# Altium PCB WX0.000.863.PcbDoc (part 4 of 4)
Units mil, origin at the board's own origin, x right, y up, seen from the top; angles counter-clockwise.
Board outline 6000 x 4000 mil, 2 copper layers (Top Layer, Bottom Layer); 210 components, 152 nets, 629 pads, 401 vias.
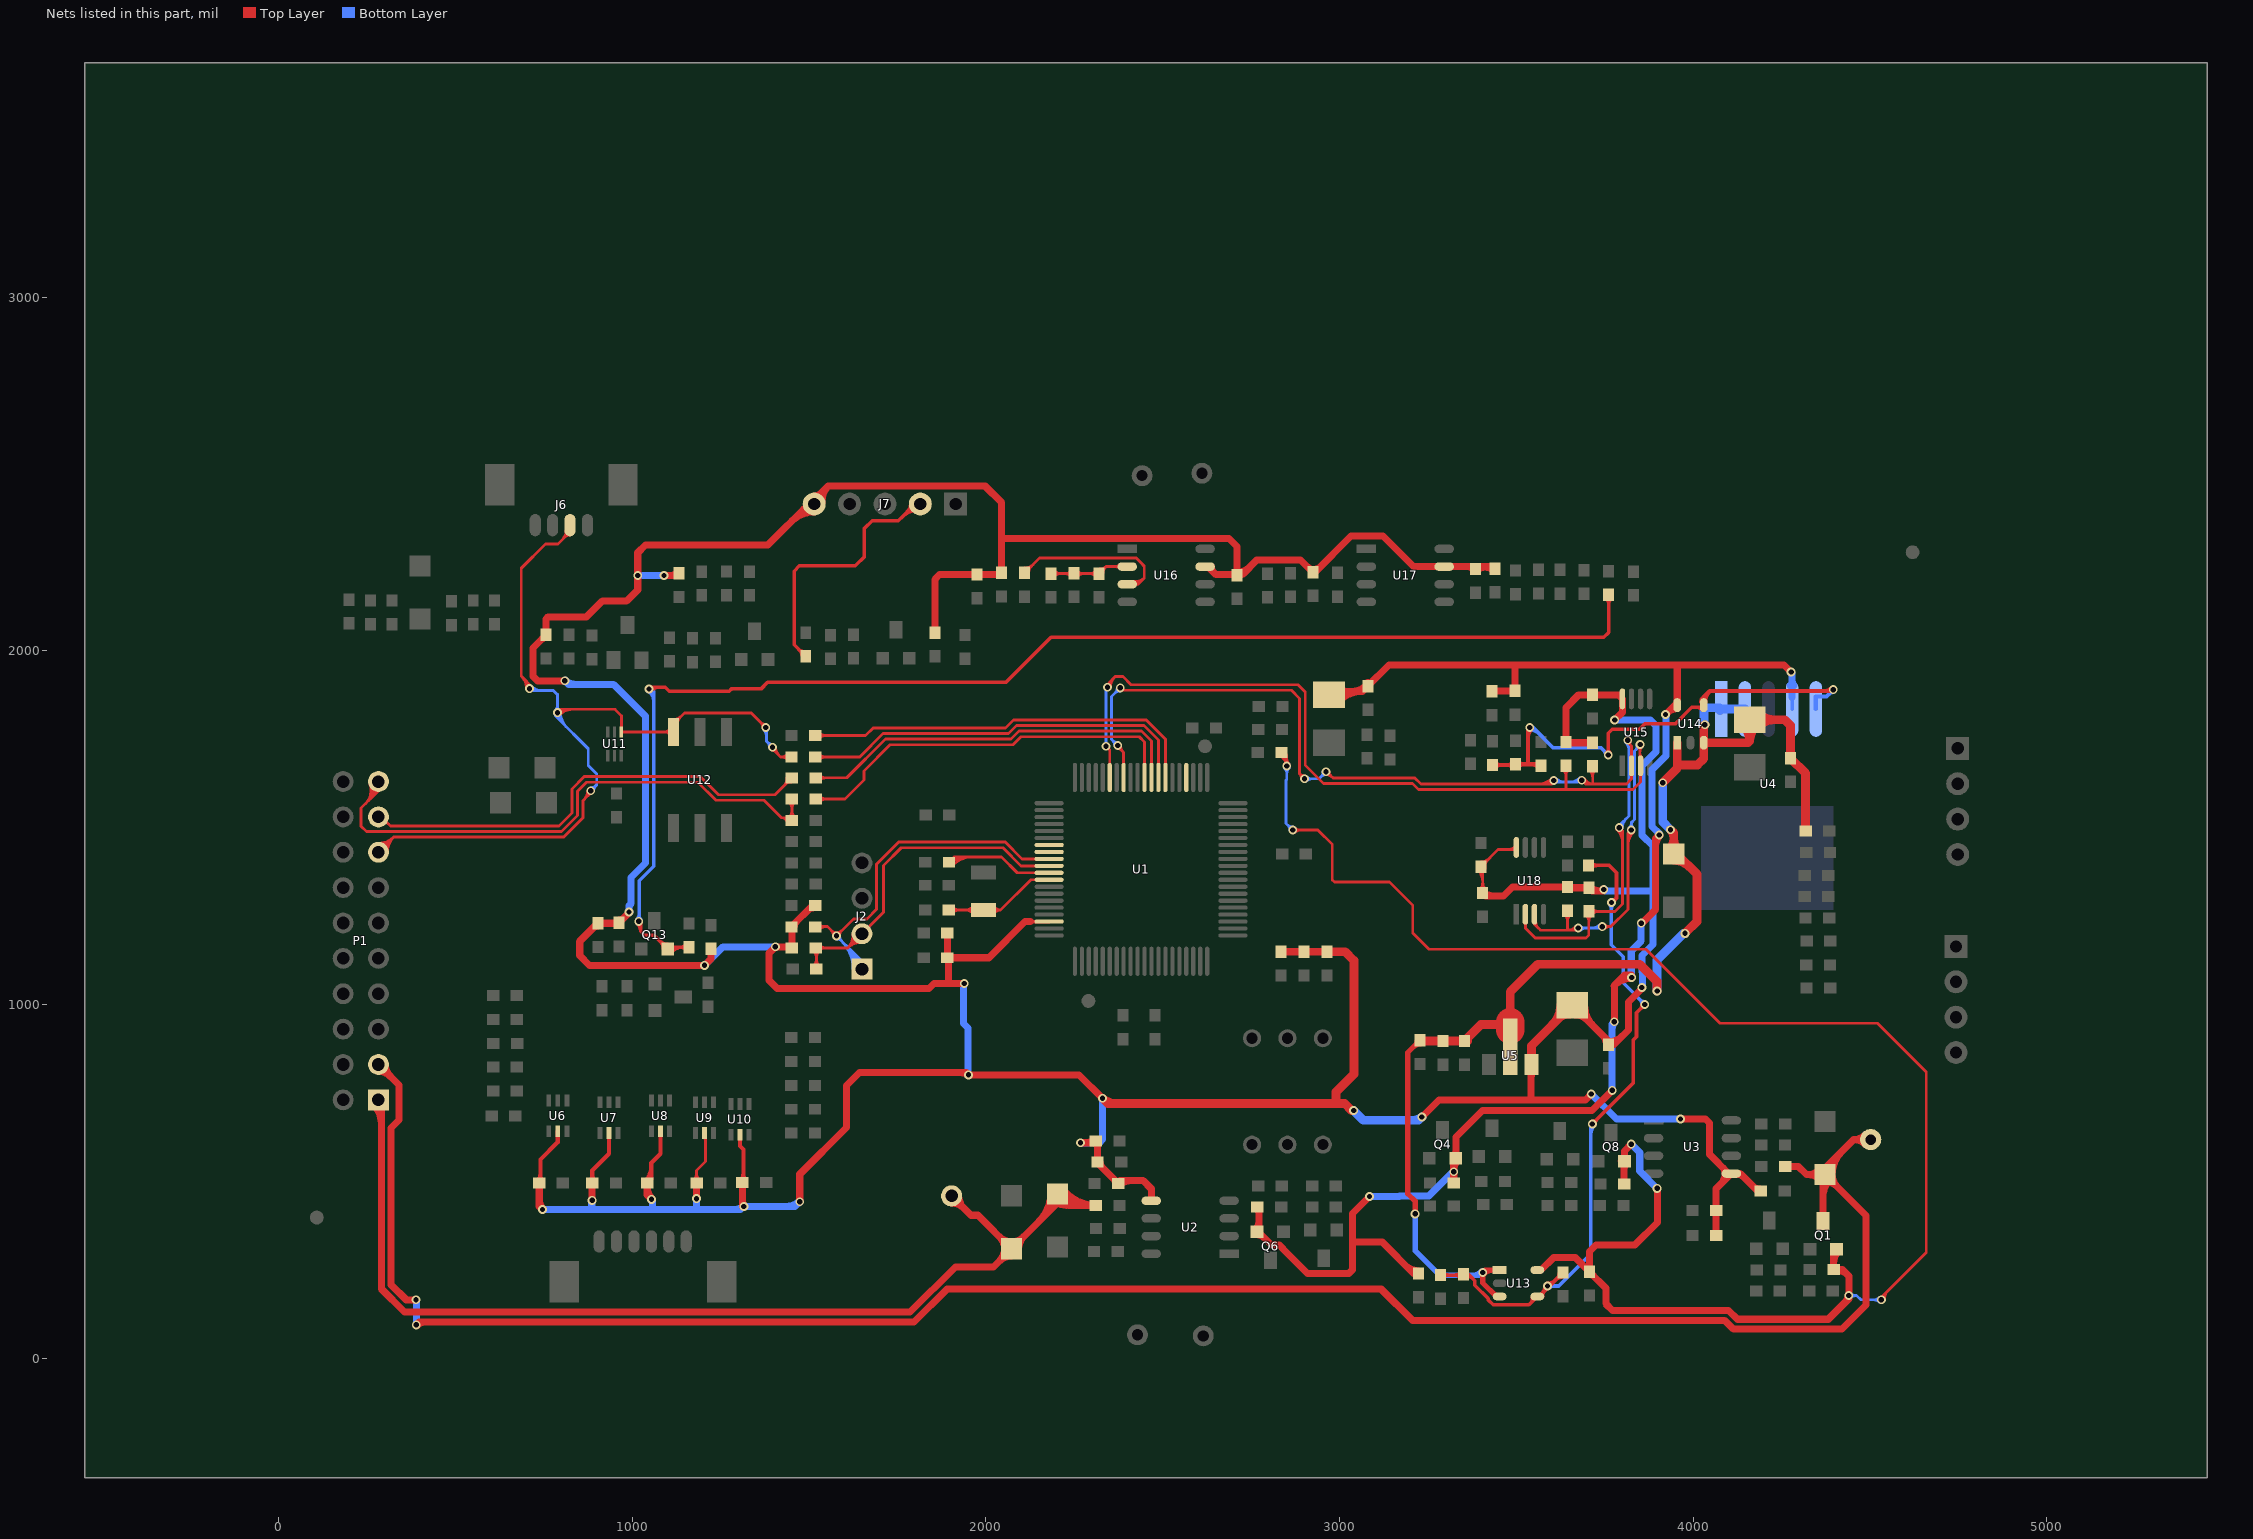
[diagram p4: the nets of this part, all layers, seen from the top]

## Via types
v1: diameter 25, hole 15, Top Layer to Bottom Layer, tented both sides, 401 vias

## Nets (pads, with @x,y where several pads share a name; then routed paths per layer and width w, separated by ;. In a path a pad name is that pad's centre, name@x,y a point inside that pad or via, vN(x,y) a via of type N, cw(c..) or ccw(c..) an arc to the next point about the centre after c; other vN are vias at no path point) (continued)
P_15: J6.2 P1.15 R67.2 U11.1 U12.6 | length 3402.3
  Top Layer w8: P1.15@283,1430.26 325.87,1473.13 ; P1.15@283.2,1447.79 ccw(c283.68,1488.45) 312.43,1459.69 ccw(c341.19,1430.94) P1.15@300.53,1430.46 ; P1.15@283.3,1455.79 ccw(c283.99,1515.01) 325.87,1473.13 ; P1.15@308.53,1430.56 cw(c367.75,1431.25) 325.87,1473.13 ; 686.6,2103 686.6,2147 ; 687,1928 cw(c652.01,1893) v1@701.5,1893 ; 700.66,1914.34 cw(c679.32,1893) v1@709.5,1893 ; v1(710,1893) 710,1905 686.6,1928.4 686.6,2147 ; v1(789,1825) 798.4,1834.4 951.6,1834.4 969.98,1816.02 969.98,1798 U11.1@969.98,1769.97 970.76,1770.75 U12.6@1117.2,1770.75 1117.2,1793.2 1148,1824 1337,1824 v1(1378,1783) ; v1@789.35,1824.65 cw(c812.9,1801.1) 812.9,1834.4 ; v1@795.01,1818.99 cw(c832.21,1781.79) 832.21,1834.4 ; 802.01,2313.01 ccw(c775.76,2339.25) J6.2@812.88,2339.25 ; 810.76,2321.76 cw(c824.63,2307.9) J6.2@824.63,2327.5 ; J6.2@824.63,2355 824.63,2335.63 791,2302 755.34,2302 686.6,2233.26 686.6,2147 ; 864.6,1579.6 ccw(c840.7,1603.51) v1@874.5,1603.9 ; v1(883,1604) 886,1601 861.6,1576.6 861.6,1527.91 806.82,1473.13 325.87,1473.13 ; U12.6@1108.89,1762.44 ccw(c1088.83,1742.39) 1088.83,1770.75 ccw(c1088.83,1799.11) U12.6@1108.89,1779.06 ; U12.6@1117.2,1806.12 ccw(c1117.2,1837.31) 1139.25,1815.25 ; U12.6@1128.94,1794.37 cw(c1154.47,1794.37) 1136.42,1812.42 ; v1@1369.5,1783 ccw(c1348.98,1783) 1363.49,1797.51 ccw(c1378,1812.02) v1@1378,1791.5 ; v1@1397,1718.5 cw(c1397,1707.64) 1404.68,1715.32 ; v1(1397,1727) 1397,1723 1420.09,1699.91 R67.2@1450.78,1699.91 ; v1@1405.5,1727 ccw(c1435.68,1727) 1414.34,1705.66 ; R67.2@1440.65,1691.78 ccw(c1421.02,1672.15) 1421.02,1699.91 ccw(c1421.02,1727.67) R67.2@1440.65,1708.04
  Bottom Layer w8: v1(710,1893) 716,1893 721,1888 777,1888 788,1877 789,1877 v1(789,1825) 789,1823 789,1810 ; v1@710.35,1893.35 ccw(c723.28,1906.28) 723.28,1888 ; v1@716.01,1899.01 ccw(c742.59,1925.59) 742.59,1888 ; v1@781.5,1825 ccw(c799.61,1825) 786.8,1812.2 ; v1@782.99,1831.01 ccw(c768.48,1845.52) 789,1845.52 ccw(c809.52,1845.52) v1@795.01,1831.01 ; v1@789.5,1825 ccw(c826.92,1825) 800.46,1798.54 ; v1@797.5,1825 ccw(c854.23,1825) 814.12,1784.88 ; v1(883,1604) 900.2,1621.2 900.2,1651.8 876,1676 876,1723 789,1810 ; v1@883,1612.5 ccw(c883,1633.02) 897.51,1618.51 ccw(c912.02,1604) v1@891.5,1604 ; v1@1371.99,1776.99 cw(c1352.65,1757.65) 1380,1757.65 ; v1(1378,1783) 1380,1785 1380,1744 v1(1397,1727) ; 1380,1767.31 cw(c1393.69,1767.31) v1@1384.01,1776.99 ; v1@1388.5,1727 ccw(c1367.98,1727) 1382.49,1741.51 ccw(c1397,1756.02) v1@1397,1735.5 ; 789,1810 cw(c797.98,1810) 793.37,1817.71 ccw(c797.98,1810) 789,1810 ; 789,1810 ccw(c780.02,1810) 784.63,1817.71 cw(c780.02,1810) 789,1810
P_17: P1.17 R62.1 | length 1387
  Top Layer w8: P1.17@283,1530.26 291.47,1530.26 317,1504.73 793.73,1504.73 830,1541 830,1609.34 864.76,1644.1 1192.9,1644.1 1244,1593 1404.37,1593 1451.78,1640.41 R62.1@1451.78,1640.82 ; P1.17@289.42,1513.95 cw(c297.33,1493.85) 312.61,1509.13 ; 1428.45,1617.08 ccw(c1404.71,1640.82) R62.1@1438.28,1640.82 ; 1434.25,1622.89 cw(c1449.78,1607.36) R62.1@1449.78,1629.32
P_19: P1.19 R31.1 R63.1 | length 1883.1
  Top Layer w8: 247.13,1568.13 ccw(c211.09,1604.17) P1.19@259,1621.55 ; 256.02,1577.02 ccw(c224.14,1608.9) P1.19@266.52,1624.28 ; 264.91,1585.91 ccw(c237.18,1613.64) P1.19@274.04,1627.01 ; 273.8,1594.8 ccw(c250.23,1618.37) P1.19@281.56,1629.74 ; P1.19@283,1630.26 283,1604 234,1555 234,1504 249.07,1488.93 800.28,1488.93 845.8,1534.46 845.8,1602.8 871.3,1628.3 928.07,1628.3 928.37,1628 1186.66,1628 1237.46,1577.2 1372.8,1577.2 1422,1528 ; 1433.78,1528 cw(c1433.78,1514.29) R31.1@1446.53,1519.35 ; R31.1@1439.09,1516.4 ccw(c1422,1509.62) 1422,1528 ; R31.1@1443.65,1528.77 ccw(c1424.02,1548.4) 1451.78,1548.4 ccw(c1479.54,1548.4) R31.1@1459.91,1528.77 ; R63.1@1443.65,1572.6 cw(c1424.02,1552.96) 1451.78,1552.96 cw(c1479.54,1552.96) R63.1@1459.91,1572.6 ; R31.1@1451.78,1520.64 R63.1@1451.78,1577.2 ; R31.1@1451.78,1528 1445,1528 1439,1528 1422,1528
PROGOP: R60.1 R85.1 R93.2 U4.5 U14.4 | length 1733.6
  Top Layer w10: 3533,1679 v1@3533,1778 ; 3533,1752.82 cw(c3568.18,1752.82) v1@3543.3,1777.7 ; v1@3754.7,1710.3 ccw(c3741.89,1723.11) 3760,1723.11 ccw(c3778.11,1723.11) v1@3765.3,1710.3 ; v1(3760,1705) 3760,1767 3771,1778 3847.69,1778 3863.69,1794 3950,1794 3996,1840 4029.8,1840 U14.4@4029.8,1846.3 ; 4009.56,1840 cw(c4009.56,1817.2) U14.4@4025.68,1833.32
  Top Layer w12: R93.2@3433,1677 3496,1677 R60.1@3498,1679 ; R93.2@3439.72,1670.28 cw(c3455.94,1654.07) 3455.94,1677 cw(c3455.94,1699.93) R93.2@3439.72,1683.72 ; R60.1@3491.28,1670.28 ccw(c3475.07,1654.07) 3475.07,1677 ccw(c3475.07,1699.93) R60.1@3491.28,1683.72 ; R60.1@3498.7,1679.7 R60.1@3498,1679 ; R60.1@3504.72,1672.28 cw(c3520.94,1656.07) 3520.94,1679 cw(c3520.94,1701.93) R60.1@3504.72,1685.72 ; 3542.24,1679 cw(c3542.24,1649.24) R85.1@3563.28,1670.28 ; 3551.89,1679 ccw(c3551.89,1695.11) R85.1@3563.28,1683.72 ; R85.1@3570,1675 3566,1679 3533,1679 R60.1@3498,1679 ; U14.4@4022.63,1855.01 cw(c4037.86,1855.32) 4027.09,1866.09 ; U14.4@4026.39,1858.57 ccw(c4018.15,1866.81) 4029.8,1866.81 ccw(c4041.46,1866.81) U14.4@4033.22,1858.57 ; U14.4@4029.8,1846.3 4029.8,1868.8 4047,1886 ; U14.4@4034.63,1855.26 cw(c4076.88,1856.11) 4047,1886 ; 4370.65,1886 ccw(c4370.65,1915.35) v1@4391.4,1894.6 ; v1(4396,1890) 4392,1886 4047,1886
  Bottom Layer w10: v1@3538,1775.5 cw(c3538,1735.67) 3566.17,1763.83 ; v1@3547,1783 3604.8,1725.2 3739.8,1725.2 v1(3760,1705) ; v1@3752.5,1705 ccw(c3734.39,1705) 3747.2,1717.8 ccw(c3760,1730.61) v1@3760,1712.5
  Bottom Layer w12: U4.5@4346.86,1835.18 4346.86,1871 4377,1871 v1(4396,1890) ; v1@4389.5,1890 cw(c4373.81,1890) 4384.9,1878.9 cw(c4396,1867.81) v1@4396,1883.5
  other v1: 3538,1783
PROGOP_BF: R11.1 R12.2 R57.1 R69.1 U13.4 | length 2379.1
  Top Layer w10: R69.1@3285,235 3367,235 ; R69.1@3292.42,227.58 cw(c3310.35,209.65) 3310.35,235 cw(c3310.35,260.35) R69.1@3292.42,242.42 ; R12.2@3342.58,227.58 ccw(c3324.65,209.65) 3324.65,235 ccw(c3324.65,260.35) R12.2@3342.58,242.42 ; R12.2@3350.06,234.5 cw(c3353.89,202.43) 3376.73,225.27 ; R12.2@3350.33,234.62 cw(c3358.83,224.93) 3367.95,234.05 ; R12.2@3356.92,227.11 cw(c3365.89,216.89) 3375.5,226.5 ; R12.2@3359.39,230.3 cw(c3367,226.49) 3367,235 ; R12.2@3359.39,239.7 ccw(c3367,243.51) 3367,235 ; 3540.1,155 ccw(c3527.19,167.91) U13.4@3544.82,172.68 ; U13.4@3559.3,174.2 3535.67,150.57 3434.36,150.57 3420.52,164.41 3420.52,168.48 3382.79,206.21 3382.79,219.21 3367,235 ; U13.4@3564.2,174.2 R11.1@3632,242 ; U13.4@3570.95,180.95 ccw(c3547.91,204) v1@3580.5,204 ; U13.4@3573.98,174.2 cw(c3597.61,174.2) 3580.9,190.9 ; v1@3588,211.5 ccw(c3588,244.09) 3611.05,221.05 ; 3610.66,220.66 cw(c3632,199.32) R11.1@3632,229.5 ; 3615.49,225.49 ccw(c3600.98,240) R11.1@3621.5,240 ; R57.1@3704,1393 3763,1393 3783.2,1372.8 3783.2,1300.2 ; R57.1@3711.42,1385.58 cw(c3729.35,1367.65) 3729.35,1393 cw(c3729.35,1418.35) R57.1@3711.42,1400.42 ; v1(3715,662) 3830,777 3830,898.96 3839.8,908.76 3839.8,976.8 v1(3863,1000) ; v1@3715,669.5 ccw(c3715,687.61) 3727.8,674.8 ccw(c3740.61,662) v1@3722.5,662 ; v1@3769.79,1295.46 ccw(c3771.53,1311.87) 3783.2,1300.2 ; v1@3770,1287 3783.2,1300.2 ; v1@3776.5,1288 cw(c3789.78,1288) 3780.39,1297.39 ; v1@3855.5,1000 cw(c3837.39,1000) 3850.2,987.2 cw(c3863,974.39) v1@3863,992.5
  Bottom Layer w10: v1(3588,204) 3620,204 3711,295 v1@3711,658 ; v1@3593.3,198.7 cw(c3606.11,185.89) 3606.11,204 cw(c3606.11,222.11) v1@3593.3,209.3 ; 3711,634.24 cw(c3742.76,634.24) v1@3720.3,656.7 ; v1@3763.7,1282.7 cw(c3753.31,1272.31) 3768,1272.31 ; 3768,1208.92 3768,1169.18 3802.18,1135 3802.18,1087.98 ; 3768,1230.78 v1@3768,1286 ; 3768,1267.48 cw(c3789.52,1267.48) v1@3774.3,1282.7 ; 3768.3,1209.22 3768.3,1230.48 ; 3800.7,1086.5 3800.7,1062.3 v1(3863,1000) ; v1@3855.5,1000 ccw(c3837.39,1000) 3850.2,1012.8 ccw(c3863,1025.61) v1@3863,1007.5
  other v1: 3769,1288
RED_RXD: J7.2 R106.1 | length 884.6
  Top Layer w10: 1469.66,2005.34 ccw(c1491,2026.68) R106.1@1491,1996.5 ; 1474.49,2000.51 cw(c1459.98,1986) R106.1@1480.5,1986 ; R106.1@1491,1984 1458,2017 1458,2120 1458,2225.2 1473,2240.2 1631.2,2240.2 1657,2266 1657,2346 1679,2368 1753,2368 J7.2@1800,2415 ; 1761.77,2376.77 cw(c1811.94,2326.6) J7.2@1814.39,2397.51 ; 1778.04,2393.04 cw(c1813.03,2358.05) J7.2@1814.74,2407.5 ; 1778.66,2393.66 ccw(c1757.32,2415) J7.2@1787.5,2415
RESET: C4.2 J2.2 R42.2 U1.10 | length 1210.6
  Top Layer w8: R42.2@1512.65,1151.96 cw(c1492.13,1131.45) 1521.14,1131.45 ; C4.2@1512.79,1108.13 ccw(c1492.63,1128.3) 1521.14,1128.3 ; C4.2@1521.14,1100 1521.14,1157.64 1518.78,1160 1610,1160 ; 1521.14,1127.23 ccw(c1548.15,1127.23) C4.2@1529.05,1108.13 ; 1521.14,1133.21 cw(c1547.66,1133.21) 1528.91,1151.96 cw(c1548.32,1132.55) 1548.32,1160 ; R42.2@1528.91,1168.22 ccw(c1548.76,1188.07) 1548.76,1160 ; J2.2@1624.52,1198.41 cw(c1574.71,1195.29) 1610,1160 ; J2.2@1632.51,1198.91 cw(c1598.31,1196.77) 1622.54,1172.54 cw(c1646.77,1148.31) J2.2@1648.91,1182.51 ; J2.2@1648.41,1174.52 ccw(c1645.29,1124.71) 1610,1160 ; U1.10@2179.14,1391.84 2099.8,1391.84 2048.64,1443 1761,1443 1710.8,1392.8 1710.8,1260.8 J2.2@1650,1200 1610,1160
S3: R65.1 U1.67 | length 1183
  Top Layer w8: R65.1@1517.78,1760 1587,1760 1660,1760 1681.8,1781.8 2056,1781.8 2078.6,1804.4 2178,1804.4 2453.8,1804.4 2504,1754.2 2504,1753.89 2507.88,1750 U1.67@2507.88,1641.84 ; R65.1@1527.91,1751.87 cw(c1547.54,1732.24) 1547.54,1760 cw(c1547.54,1787.76) R65.1@1527.91,1768.13
S4: R67.1 U1.68 | length 1173.5
  Top Layer w8: R67.1@1517.78,1699.91 1643.56,1699.91 1709.66,1766 2064.31,1766 2086.91,1788.6 2251,1788.6 2447.26,1788.6 2488.2,1747.66 U1.68@2488.2,1641.84 ; R67.1@1527.91,1691.78 cw(c1547.54,1672.15) 1547.54,1699.91 cw(c1547.54,1727.67) R67.1@1527.91,1708.04
S5: R62.2 U1.69 | length 1162.7
  Top Layer w8: R62.2@1518.78,1640.82 1606.82,1640.82 1716.2,1750.2 2070.86,1750.2 2093.46,1772.8 2440.71,1772.8 2468.51,1745 U1.69@2468.51,1641.84 ; R62.2@1528.91,1632.69 cw(c1548.54,1613.05) 1548.54,1640.82 cw(c1548.54,1668.58) R62.2@1528.91,1648.95
S6: R63.2 U1.70 | length 1211.6
  Top Layer w8: R63.2@1518.78,1580.73 1601.73,1580.73 1655.4,1634.4 1655.4,1660.18 1729.62,1734.4 2077.4,1734.4 2100,1757 2434,1757 2448.83,1742.17 U1.70@2448.83,1641.84 2448.83,1685.17 ; R63.2@1528.91,1572.6 cw(c1548.54,1552.96) 1548.54,1580.73 cw(c1548.54,1608.49) R63.2@1528.91,1588.86
S9: U1.7
S10: U1.8
SING_OUT: Q13.E R75.1 R113.1 | length 4116.1
  Top Layer w10: v1@1014.08,1229.34 cw(c995.09,1207.54) 1024,1207.54 ; v1(1019,1235) 1024,1235 1024,1208 1036,1196 1061.98,1196 Q13.E@1100.98,1157 1105.98,1162 R75.1@1160.98,1162 ; v1(1048,1892) 1048,1897 1094,1897 1105,1886 1275,1886 1281,1892 1364.44,1892 1383.04,1910.6 2057.36,1910.6 2184.56,2037.8 3747,2037.8 3761,2051.8 R113.1@3761,2158 ; v1@1053.3,1886.7 cw(c1078.18,1861.82) 1078.18,1897 ; Q13.E@1087.98,1157 ccw(c1056.6,1157) 1078.79,1179.19 ccw(c1100.98,1201.38) Q13.E@1100.98,1170 ; Q13.E@1103.11,1154.88 cw(c1120.3,1137.69) 1120.3,1162 cw(c1120.3,1176.31) Q13.E@1110.18,1166.19 ; Q13.E@1110.18,1147.81 cw(c1144.44,1113.54) 1144.44,1162 ; R75.1@1153.56,1154.58 ccw(c1135.64,1136.65) 1135.64,1162 ccw(c1135.64,1187.35) R75.1@1153.56,1169.42 ; R113.1@3753.58,2148.58 cw(c3735.65,2130.65) 3761,2130.65 cw(c3786.35,2130.65) R113.1@3768.42,2148.58
  Bottom Layer w10: v1@1013.7,1240.3 ccw(c998.48,1255.52) 1020,1255.52 ; v1@1017.45,1236.55 v1(1019,1235) 1020,1236 1020,1301.26 1019.82,1301.44 1019.82,1349.82 1060.9,1390.9 1060.9,1863.1 1060.9,1885.1 1059,1887 1048,1898 v1(1048,1892) ; 1020,1250.69 ccw(c1034.69,1250.69) v1@1024.3,1240.3 ; v1@1044.9,1885.17 cw(c1033.65,1860.35) 1060.9,1860.35 ; v1@1049.03,1894.28 cw(c1040.69,1875.87) 1060.9,1875.87
SZ_P_SCL: R6.2 R56.2 U1.73 U15.2 U18.2 | length 3751.7
  Top Layer w8: v1@2373,1723.5 cw(c2373,1710.22) 2382.39,1719.61 ; v1@2373,1729 2389.77,1712.23 U1.73@2389.77,1641.84 ; v1(2380,1895) 2386.8,1888.2 2864,1888.2 2887,1865.2 2887,1652 ; v1@2381.49,1731.52 ccw(c2404.74,1730.2) 2388.27,1713.73 ; v1@2892.5,1638.22 ccw(c2873.7,1638.7) 2887,1652 ; v1@2900.78,1646.5 cw(c2900.3,1665.3) 2887,1652 ; v1(2901,1638) 2887,1652 ; v1@2962,1649.5 cw(c2962,1624.15) 2979.92,1642.08 ; v1(2962,1658) 2964,1658 2981.3,1640.7 3212.99,1640.7 3230.09,1623.6 3600.6,1623.6 3606,1629 v1(3606,1633) ; v1@2970.5,1658 ccw(c2986.19,1658) 2975.1,1646.9 ; U18.2@3522.99,1230.55 cw(c3516.71,1224.27) 3525.59,1224.27 cw(c3534.47,1224.27) U18.2@3528.19,1230.55 ; U18.2@3525.59,1255 3525.59,1215.41 3553.5,1187.5 3696.5,1187.5 3705,1196 R56.2@3705,1263 3779,1263 3800,1284 v1@3800,1492 ; 3562.79,1623.6 ccw(c3562.79,1676.21) v1@3599.99,1639.01 ; 3582.1,1623.6 ccw(c3582.1,1656.9) v1@3605.65,1633.35 ; v1(3685,1634) 3695.4,1623.6 3716,1623.6 ; v1@3685.44,1634.23 ccw(c3702.88,1643.21) 3702.88,1623.6 ; v1@3692.56,1637.89 ccw(c3716,1649.97) 3716,1623.6 ; R56.2@3696.87,1252.87 cw(c3677.24,1233.24) 3705,1233.24 cw(c3732.76,1233.24) R56.2@3713.13,1252.87 ; R6.2@3706.87,1662.87 cw(c3684.82,1640.82) 3716,1640.82 ; R56.2@3713.13,1254.87 cw(c3732.76,1235.24) 3732.76,1263 cw(c3732.76,1290.76) R56.2@3713.13,1271.13 ; R6.2@3715,1673 3716,1672 3716,1623.6 ; 3716,1645.65 cw(c3740.35,1645.65) R6.2@3723.13,1662.87 ; v1@3784.99,1493.99 cw(c3748.75,1457.75) 3800,1457.75 ; v1@3790.65,1499.65 cw(c3768.07,1477.07) 3800,1477.07 ; v1(3815,1747) 3815,1741 3825.59,1730.41 U15.2@3825.59,1675 ; v1@3821.9,1742.03 ccw(c3827.31,1738.13) 3822.59,1733.41 ; U15.2@3822.99,1650.55 cw(c3816.71,1644.27) 3825.59,1644.27 cw(c3834.47,1644.27) U15.2@3828.19,1650.55 ; U15.2@3822.99,1699.45 ccw(c3816.71,1705.73) 3825.59,1705.73 ccw(c3834.47,1705.73) U15.2@3828.19,1699.45 ; U15.2@3827.54,1676.95 U15.2@3825.59,1675 ; 3716,1623.6 3811,1623.6 3825.59,1638.19 U15.2@3825.59,1675
  Bottom Layer w8: v1@2364.5,1732 ccw(c2343.98,1732) 2358.49,1746.51 ccw(c2373,1761.02) v1@2373,1740.5 ; v1@2371,1732 v1(2373,1732) 2355.8,1749.2 2355.8,1870.8 v1(2380,1895) ; v1@2371.5,1895 cw(c2350.98,1895) 2365.49,1880.49 cw(c2380,1865.98) v1@2380,1886.5 ; v1(2901,1638) 2942,1638 v1(2962,1658) ; v1@2907.01,1631.99 cw(c2921.52,1617.48) 2921.52,1638 cw(c2921.52,1658.52) v1@2907.01,1644.01 ; v1@2953.5,1658 cw(c2932.98,1658) 2947.49,1643.49 cw(c2962,1628.98) v1@2962,1649.5 ; v1(3606,1633) 3606,1632 3609,1629 3674,1629 3679,1634 v1(3685,1634) ; v1@3612.01,1639.01 ccw(c3636.18,1663.18) 3636.18,1629 ; 3652.41,1629 ccw(c3652.41,1666.59) v1@3678.99,1640.01 ; 3671.72,1629 ccw(c3671.72,1647.28) v1@3684.65,1634.35 ; v1(3791,1500) 3791,1505.7 3818.3,1533 3818.3,1743.7 v1(3815,1747) ; v1@3799.5,1500 cw(c3833.78,1500) 3809.54,1524.24 ; v1@3808.99,1740.99 cw(c3786.51,1718.51) 3818.3,1718.51 ; 3818.3,1734.45 cw(c3827.55,1734.45) v1@3821.01,1740.99
SZ_P_SDA: R61.1 R99.1 U1.75 U15.3 U18.3 | length 3575.5
  Top Layer w8: v1(2340,1730) 2350.4,1719.6 U1.75@2350.4,1641.84 ; v1(2344,1897) 2344,1905 2366,1927 2388,1927 2411,1904 2883,1904 2903,1884 2903,1677 2955.1,1624.9 3206.44,1624.9 3223.54,1607.8 3640,1607.8 ; v1@2344.5,1897 cw(c2365.02,1897) 2350.51,1911.51 ; v1@2352.5,1897 cw(c2392.33,1897) 2364.17,1925.17 ; U18.3@3551.18,1255 3551.18,1226.82 3568,1210 3647,1210 ; U18.3@3554.86,1233.15 ccw(c3579.02,1233.15) 3561.93,1216.07 ; R99.1@3631.87,1664.87 cw(c3612.24,1645.24) 3640,1645.24 cw(c3667.76,1645.24) R99.1@3648.13,1664.87 ; R61.1@3636.87,1254.87 cw(c3617.24,1235.24) 3645,1235.24 cw(c3672.76,1235.24) R61.1@3653.13,1254.87 ; 3640,1617.8 3640,1641 ; R99.1@3640,1675 3640,1641 ; R61.1@3645,1265 3645,1212 3647,1210 ; 3662.45,1210 ccw(c3662.45,1224.87) v1@3674.59,1216.29 ; v1@3668.06,1220.9 cw(c3647,1235.78) 3647,1210 ; v1(3675,1216) 3675,1215 3670,1210 3647,1210 ; v1(3743,1220) 3767,1220 3815.8,1268.8 3815.8,1483.8 v1(3825,1493) ; v1@3749.01,1213.99 cw(c3763.52,1199.48) 3763.52,1220 cw(c3763.52,1240.52) v1@3749.01,1226.01 ; 3815.8,1450.27 cw(c3867.73,1450.27) v1@3831.01,1486.99 ; 3815.8,1469.58 cw(c3848.42,1469.58) v1@3825.35,1492.65 ; v1@3843.99,1728.99 cw(c3831.89,1716.89) 3849,1716.89 ; U15.3@3848.58,1650.55 cw(c3842.3,1644.27) 3851.18,1644.27 cw(c3860.06,1644.27) U15.3@3853.78,1650.55 ; 3849,1710.99 ccw(c3865.32,1710.99) U15.3@3853.78,1699.45 ; 3849,1712.07 cw(c3872.94,1712.07) v1@3856.01,1728.99 ; v1(3850,1735) 3850,1736 3849,1737 3849,1677.18 U15.3@3851.18,1675 3851.18,1629 3829.98,1607.8 3640,1607.8 ; 3640,1607.8 3640,1641
  Bottom Layer w8: v1(2340,1730) v1@2340,1893 ; v1(3675,1216) 3739,1216 v1(3743,1220) ; v1@3681.01,1209.99 cw(c3695.52,1195.48) 3695.52,1216 cw(c3695.52,1236.52) v1@3681.01,1222.01 ; 3712.82,1216 ccw(c3712.82,1250.18) v1@3736.99,1226.01 ; v1@3818.99,1499.01 ccw(c3804.48,1513.52) 3825,1513.52 ccw(c3845.52,1513.52) v1@3831.01,1499.01 ; v1(3825,1493) 3825,1513.9 3834.1,1523 3834.1,1716.1 3851,1733 3851,1734 v1(3850,1735) ; 3835.6,1717.6 ccw(c3821.03,1732.17) v1@3841.54,1734.17 ; 3840.61,1722.61 cw(c3850,1713.22) v1@3850,1726.5
TOOL0: J2.1 R40.1 U1.9 | length 1493
  Top Layer w8: R40.1@1517.78,1220 1552,1220 v1(1578,1194) 1626,1242 1664,1242 1691.33,1269.33 1691.33,1396.33 1754,1459 ; R40.1@1527.91,1211.05 cw(c1549.52,1189.44) 1549.52,1220 ; R40.1@1527.91,1227.31 ccw(c1545.57,1244.97) 1545.57,1220 ; v1@1569.5,1194 ccw(c1548.98,1194) 1563.49,1208.51 ccw(c1578,1223.02) 1578,1202.5 ccw(c1578,1223.02) 1592.51,1208.51 ccw(c1607.02,1194) v1@1586.5,1194 ; 1695,1400 1754,1459 ; U1.9@2179.14,1411.53 2102.46,1411.53 2054.98,1459 1754,1459
  Bottom Layer w8: v1@1578,1185.5 cw(c1578,1164.98) 1592.51,1179.49 cw(c1607.02,1194) v1@1586.5,1194 ; v1(1578,1194) 1650,1122 J2.1@1650,1100 ; 1590.87,1181.13 cw(c1509.73,1100) J2.1@1624.47,1100 ; 1604.52,1167.48 cw(c1537.04,1100) J2.1@1632.47,1100 ; 1618.18,1153.82 cw(c1564.36,1100) J2.1@1640.47,1100 ; 1631.84,1140.16 cw(c1591.67,1100) J2.1@1648.47,1100
V+: R110.2 U16.3 | length 572.6
  Top Layer w8: R110.2@2110,2220 2151.8,2261.8 2425.42,2261.8 2439.36,2247.86 2439.36,2247.64 2448,2239 2448,2206 ; R110.2@2110,2233.5 ccw(c2110,2266.09) 2133.05,2243.05 ; R110.2@2121.5,2222 cw(c2144.43,2222) 2128.22,2238.22 ; U16.3@2400,2188 2430,2188 ; U16.3@2415.56,2188 ccw(c2419.46,2212.38) 2436.92,2194.92 ; U16.3@2416.82,2195.9 ccw(c2422.52,2231.48) 2448,2206 ; U16.3@2422.34,2183.76 cw(c2430,2178.97) 2430,2188 ; U16.3@2422.34,2192.24 ccw(c2430,2197.03) 2430,2188 ; 2430,2188 2448,2206
V-: C41.2 R108.1 R109.1 U16.2 | length 466.6
  Top Layer w8: R109.1@2185,2218 R108.1@2320,2218 2340,2238 ; R109.1@2193.13,2209.87 cw(c2212.76,2190.24) 2212.76,2218 cw(c2212.76,2245.76) R109.1@2193.13,2226.13 ; 2221.05,2218 cw(c2221.05,2188.56) C41.2@2241.87,2209.38 ; 2223.42,2218 ccw(c2223.42,2244.09) C41.2@2241.87,2225.64 ; C41.2@2258.13,2209.38 cw(c2278.95,2188.56) 2278.95,2218 ; C41.2@2258.13,2225.64 ccw(c2276.58,2244.09) 2276.58,2218 ; R108.1@2311.87,2209.87 ccw(c2292.24,2190.24) 2292.24,2218 ccw(c2292.24,2245.76) R108.1@2311.87,2226.13 ; R108.1@2321.27,2231.43 ccw(c2323.8,2254.2) 2340,2238 ; R108.1@2331.5,2220 cw(c2354.43,2220) 2338.22,2236.22 ; U16.2@2378.78,2232.34 ccw(c2365.13,2218.69) 2365.13,2238 ccw(c2365.13,2257.31) U16.2@2378.78,2243.66 ; U16.2@2400,2238 2340,2238
VCC: C7.1 C8.1 C14.1 C18.2 C19.2 C20.2 C21.1 C22.1 C23.1 C24.1 C25.1 C26.1 C35.1 C42.1 C44.1 C47.1 C48.1 C49.1 J7.5 R1.2 R6.1 R13.1 R28.2 R29.2 R36.2 R40.2 R42.1 R45.1 R46.2 R47.2 R56.1 R61.2 R70.2 R96.2 R97.2 R98.2 R99.2 R102.1 R105.2 R111.2 R115.2 U1.18 U2.5 U3.5 U5.3 U6.5 U7.5 U8.5 U9.5 U10.5 U15.8 U16.7 U17.7 U18.8 | length 19193
  Top Layer w8: C23.1@887.51,495 C23.1@890.98,498.48 ; C25.1@1174.38,503.13 ccw(c1154.75,522.76) 1182.51,522.76 ccw(c1210.27,522.76) C25.1@1190.64,503.13 ; C25.1@1182.51,495 1182.51,530.51 1207.98,555.98 1207.98,567 ; U9.5@1202.96,624.81 cw(c1190.82,612.67) 1207.98,612.67 ; U9.5@1205,636.69 1207.98,633.71 1207.98,567 ; 1207.98,582.69 1207.98,567 ; U16.7@2620,2238 U16.7@2627.7,2238 ; C42.1@2708.49,2215 C42.1@2710,2213.49 2732.49,2213.49 ; C42.1@2719.32,2206.76 cw(c2732.49,2197.25) 2732.49,2213.49 ; C42.1@2719.32,2220.22 ccw(c2732.49,2229.73) 2732.49,2213.49 ; 2901.95,2245.05 ccw(c2925,2268.09) R111.2@2925,2235.5 ; 2906.78,2240.22 cw(c2890.57,2224) R111.2@2913.5,2224 ; R111.2@2925,2222 2895,2252 2771,2252 2732.49,2213.49 ; U17.7@3296,2238 3364.49,2238 3372,2230.49 3431.51,2230.49 R115.2@3433,2229 ; U17.7@3317.22,2232.34 cw(c3330.87,2218.69) 3330.87,2238 cw(c3330.87,2257.31) U17.7@3317.22,2243.66 ; C49.1@3391.87,1379.38 cw(c3360.17,1347.67) 3405,1347.67 ; C44.1@3393.13,2222.85 cw(c3411.58,2204.4) 3411.58,2230.49 ; C44.1@3393.13,2239.11 ccw(c3413.95,2259.93) 3413.95,2230.49 ; R13.1@3396.87,1325.13 ccw(c3377.24,1344.76) 3405,1344.76 ccw(c3432.76,1344.76) R13.1@3413.13,1325.13 ; C49.1@3397.53,1385.03 cw(c3379.48,1366.99) 3405,1366.99 ; C49.1@3400,1403.01 ccw(c3400,1435.6) 3423.05,1412.55 ; R13.1@3405,1315 3405,1384.51 C49.1@3400,1389.51 3405,1394.51 3448.49,1438 3494.02,1438 U18.8@3500,1443.98 ; 3405,1371.82 cw(c3415.69,1371.82) C49.1@3408.13,1379.38 ; 3411.05,2230.49 cw(c3411.05,2201.05) R115.2@3431.87,2221.87 ; C49.1@3411.5,1391.51 cw(c3434.44,1391.51) 3418.22,1407.73 ; 3413.42,2230.49 ccw(c3413.42,2256.58) R115.2@3431.87,2238.13 ; 3476.69,1438 ccw(c3476.69,1467.28) U18.8@3497.4,1446.58 ; R61.2@3645,1332 3647,1330 R56.1@3705,1330 ; R61.2@3653.13,1321.87 cw(c3672.76,1302.24) 3672.76,1330 cw(c3672.76,1357.76) R61.2@3653.13,1338.13 ; R56.1@3696.87,1321.87 ccw(c3677.24,1302.24) 3677.24,1330 ccw(c3677.24,1357.76) R56.1@3696.87,1338.13
  Top Layer w10: 2126.62,1234.36 U1.18@2179.14,1234.36
  Top Layer w12: C22.1@732.79,501.72 ccw(c713.01,521.5) 740.98,521.5 ; C22.1@737.51,495 740.98,498.48 740.98,561.98 789.7,610.7 789.7,641.39 U6.5@790,641.69 ; 740.98,514.37 ccw(c758.88,514.37) C22.1@746.23,501.72 ; C23.1@880.79,501.72 ccw(c864.57,517.93) 887.51,517.93 ccw(c910.44,517.93) C23.1@894.23,501.72 ; C23.1@887.51,495 887.51,530.51 935,578 U7.5@935,636.69 ; C24.1@1037.79,501.72 ccw(c998.66,540.85) 1054,540.85 ; C24.1@1042.51,495 1054,506.49 1054,552 1080,578 U8.5@1080,641.69 ; C24.1@1046.28,493.23 ccw(c1027.63,511.88) 1054,511.88 ; U10.5@1305,631.69 1305,599.52 1314.8,589.72 1314.8,499.8 C26.1@1312,497 C26.1@1305.33,490.33 ; C26.1@1307.28,503.72 ccw(c1289.14,521.86) 1314.8,521.86 ; 1314.8,518.01 ccw(c1335.01,518.01) C26.1@1320.72,503.72
  Top Layer w20: 737.51,448.95 ccw(c775.95,448.95) v1@748.77,421.77 ; C22.1@737.51,495 737.51,429.49 v1(747,420) ; R102.1@744.2,2032.2 cw(c757,2019.39) R102.1@757,2037.5 ; v1(810,1915) 733,1915 720,1928 720,2008 R102.1@757,2045 757,2090 763,2096 871,2096 915.8,2140.8 984.8,2140.8 1016,2172 v1(1016,2213) 1016,2277 1037.6,2298.6 1383.6,2298.6 J7.5@1500,2415 ; v1(887,446) C23.1@887,494.49 ; C21.1@890.2,1216.69 cw(c903,1203.88) C21.1@903,1221.99 ; R1.2@963,1238.5 ccw(c963,1256.61) R1.2@975.8,1243.8 ; v1@989,1257 R1.2@963,1231 ; C24.1@1042.51,485.19 ccw(c1091.19,485.19) v1@1056.77,450.77 ; C24.1@1042.51,495 1042.51,461.49 v1(1055,449) ; v1(1090,2213) 1126,2213 R70.2@1132,2219 ; 1109.07,2213 ccw(c1109.07,2239.93) R70.2@1128.11,2220.89 ; v1@1182.51,451.51 C25.1@1182.51,495 ; R36.2@1223,1157 1223,1129 v1(1204.5,1110.5) 879.5,1110.5 852,1138 852,1178.49 C21.1@903,1229.49 R1.2@961.49,1229.49 ; v1@1312,429 C26.1@1312,490.33 ; 1312,444.68 ccw(c1331.68,444.68) v1@1317.77,430.77 ; 1429.48,1163 cw(c1429.48,1139.79) R42.1@1445.89,1156.2 ; R40.2@1446.89,1215.29 cw(c1435.09,1203.49) 1451.78,1203.49 ; 1450.98,2365.98 cw(c1515,2301.97) J7.5@1515,2392.5 ; R40.2@1458.28,1219.18 cw(c1478.36,1219.18) R40.2@1464.16,1233.38 ; v1(1474,442) 1474,520 1606.6,652.6 1606.6,770.6 1643.2,807.2 v1@1944.78,807.2 ; 1485.13,2400.13 cw(c1515,2370.25) J7.5@1515,2412.5 ; 1496.61,1265.83 cw(c1515.78,1246.67) R45.1@1515.78,1273.77 ; J7.5@1515,2415 1515,2426 1554.3,2465.3 ; J7.5@1515,2437.5 ccw(c1515,2465.26) 1534.63,2445.63 ; R45.1@1517.78,1280 1510.78,1280 1450.78,1220 1451.78,1219 1451.78,1160 1448.78,1163 v1(1405,1163) 1387.6,1145.6 1387.6,1067.4 1410.4,1044.6 1839,1044.6 1853.4,1059 1894,1059 ; J7.5@1537.37,2417.39 cw(c1595.96,2423.64) 1554.3,2465.3 ; R105.2@1856,2053.7 R105.2@1856,2051 1856,2202 1869.49,2215.49 C47.1@1975,2215.49 2040,2215.49 C48.1@2045,2220.49 2045,2317.81 ; C7.1@1891.48,1202 C8.1@1891.48,1132 ; 1929.98,807.2 cw(c1929.98,780) v1@1949.22,799.23 ; v1@1936,1059 1894,1059 ; v1(1950.98,801) 2264,801 v1(2330,735) ; 2024.48,2215.49 ccw(c2024.48,2239.01) C48.1@2041.11,2222.38 ; 2126.62,1234.36 2110.98,1234.36 2008.62,1132 C8.1@1891.48,1132 ; v1(2268,609) R29.2@2311,609 ; 2283.65,609 ccw(c2283.65,639.35) R29.2@2305.11,617.89 ; R29.2@2309.11,610.11 cw(c2292.48,593.48) 2316,593.48 ; R29.2@2311,614 2316,609 R28.2@2316,554 2316,552.51 C20.2@2374.51,494 ; R28.2@2323.5,554 ccw(c2345.21,554) R28.2@2329.86,538.65 ; C20.2@2361.71,506.8 cw(c2348.9,494) C20.2@2367.01,494 ; C20.2@2379.49,502 2445,502 2467.98,479.02 U2.5@2467.98,445 ; C20.2@2380.4,490.11 cw(c2409.1,461.41) 2409.1,502 ; U16.7@2627.7,2238 2650.7,2215 2708.49,2215 2724,2215 2766,2257 2890,2257 R111.2@2925,2222 2931,2222 3033,2324 3123,2324 3209,2238 3424,2238 ; U16.7@2637.56,2238 ccw(c2661.35,2238) 2644.53,2221.17 ; C42.1@2710,2213.49 2710,2295 2687.19,2317.81 2045,2317.81 ; C42.1@2710,2220.99 ccw(c2710,2269.25) 2744.13,2235.13 ; R96.2@2835,1149 R97.2@2900,1149 R98.2@2965,1149 ; R111.2@2912.2,2234.8 ccw(c2925,2247.61) 2925,2229.5 ccw(c2925,2262.09) 2948.05,2239.05 ; v1(3233,682) 3281.27,730.27 3542,730.27 ; 3359.61,2238 cw(c3359.61,2207.59) C44.1@3381.11,2229.09 ; C44.1@3388.89,2229.09 cw(c3410.39,2207.59) 3410.39,2238 ; R13.1@3405,1315 3413,1307 3464,1307 3489,1332 R61.2@3645,1332 3647,1330 R56.1@3705,1330 3714,1321 3747,1321 v1(3747,1325) ; C49.1@3405,1384.51 C49.1@3405,1394.51 ; R13.1@3408.89,1316.89 ccw(c3432.76,1340.76) 3432.76,1307 ; 3417.07,2238 cw(c3417.07,2211.07) R115.2@3436.11,2230.11 ; R115.2@3431.51,2230.49 3424,2238 ; R115.2@3435.17,2231.37 ccw(c3424,2225.28) 3424,2238 ; U5.3@3535.91,812.93 cw(c3521.22,798.23) 3542,798.23 ; 3542,793.48 cw(c3569.5,793.48) U5.3@3550.06,812.93 ; U5.3@3542.98,830 3542,829.02 3542,730.27 ; C14.1@3657.98,998.36 3760,896.35 C18.2@3760,886.51 3775.51,886.51 3817,928 3817,967 ; C14.1@3665.48,970.86 cw(c3665.48,922.58) 3699.63,956.72 ; C14.1@3692.98,998.36 ccw(c3777.48,998.36) 3717.73,938.62 ; R56.1@3708.89,1331.89 ccw(c3735.18,1358.18) 3735.18,1321 ; v1(3711.98,747) 3695.26,730.27 3542,730.27 ; R6.1@3715,1740 3642,1740 R99.2@3640,1742 3640,1839 3676.49,1875.49 C35.1@3715,1875.49 3788.49,1875.49 U15.8@3800,1863.98 3800,1826 v1(3778,1804) ; 3731.31,1321 ccw(c3731.31,1340.69) v1@3745.23,1326.77 ; 3745.07,911.28 cw(c3722.29,888.51) C18.2@3754.5,888.51 ; C18.2@3760,894.01 ccw(c3760,949.56) 3799.28,910.28 ; 3817,988 3817,967 ; v1(3855,1048) 3855,1045 3817,1007 3817,967 ; v1(3963.98,676) 4034.98,676 4045.98,665 4045.98,576.3 4100.28,522 U3.5@4107.98,522 ; R47.2@4064.98,347 R46.2@4064.98,417 4064.98,479 U3.5@4107.98,522 ; 4078.01,492.02 ccw(c4048.03,522) 4090.43,522 ccw(c4066.63,522) 4083.46,538.83 ; U3.5@4123.54,520 cw(c4123.54,492.38) 4143.07,511.91 ; 4169.01,485.98 ccw(c4189.48,506.45) C19.2@4189.48,477.5 ; C19.2@4191.48,472 4182.98,472 4132.98,522 U3.5@4107.98,522 ; R1.2@961.49,1229.49 R1.2@963,1231 ; R1.2@961.49,1229.49 R1.2@963,1231 ; 1554.3,2465.3 1998.7,2465.3 2045,2419 2045,2317.81 ; C8.1@1891.48,1132 1894,1129.48 1894,1059
  Top Layer w25: 2366.21,720 cw(c2366.21,771.21) v1(2330,735) 2345,720 2990,720 ; R98.2@2965,1149 3016,1149 3040.68,1124.32 3040.68,802.68 2990,752 2990,720 ; v1@3034.61,700 3014.61,720 2990,720 ; U5.3@3542.98,830 3542.98,883.37 C14.1@3657.98,998.36 C14.1@3671.35,998.36 ; 3602.5,942.88 ccw(c3547.02,998.36) C14.1@3625.48,998.36 ; C14.1@3620.61,960.99 cw(c3650.48,931.12) C14.1@3650.48,973.37
  Bottom Layer w20: v1(747,420) 886,420 ; v1(810,1915) 820,1905 948,1905 1038.1,1814.9 1038.1,1400.34 997.02,1359.26 997.02,1292 997.2,1291.82 997.2,1285 ; v1@811.77,1916.77 ccw(c840.18,1945.18) 840.18,1905 ; v1@886,441 886,420 ; v1@993.45,1262.6 cw(c1011.03,1271.17) 997.2,1285 ; v1(1016,2213) v1(1090,2213) ; v1@1053.23,447.23 cw(c1041.72,435.72) 1058,435.72 ; v1@1058,446 1058,420 ; 1182,422 v1(1182,451) ; v1(1204.5,1110.5) 1257,1163 v1(1405,1163) ; 1288.24,420 ccw(c1288.24,456.76) v1@1314.23,430.77 ; 1307,420 1058,420 ; v1(1316,429) 1461,429 v1(1474,442) ; 1436.57,429 ccw(c1436.57,479.43) v1@1472.23,443.77 ; v1@1936.98,1056.98 1936.98,946 1949.98,933 v1@1949.98,801 ; v1(2268,609) 2321,609 2330,618 v1(2330,735) ; v1(3711.98,747) 3782.98,676 v1(3963.98,676) ; v1(3747,1325) 3751,1321 3886.3,1321 ; v1@3748.77,1326.77 ccw(c3762.69,1340.69) 3762.69,1321 ; v1(3778,1804) 3879.2,1804 3895.2,1788 3895.2,1714.52 3855.9,1675.22 3855.9,1477.95 3886.3,1447.55 3886.3,1321 ; v1(3855,1048) 3856.3,1049.3 3856.3,1089.87 3855,1091.17 3855,1138.15 3886.3,1169.45 3886.3,1321 ; 886,420 1058,420 ; v1@991.2,1264.95 994.65,1261.5 v1(991.2,1261.5) v1@991.2,1264.95 ; v1@991.2,1264.95 991.2,1279 997.2,1285
  Bottom Layer w25: v1(3040,700) 3067.2,672.8 3223.8,672.8 ; 3210.79,672.8 ccw(c3210.79,704.21) v1(3233,682)
  other v1: 1939,1059
VI: C11.1 C13.2 C15.2 C16.2 C17.2 F1.2 R5.2 U4.1 U4.2 U5.2 U13.1 U13.3 U14.1 U14.3 | length 4192.1
  Top Layer w15: 3193.08,618 3193.08,630 ; 3210.91,881.44 cw(c3227.98,864.37) C17.2@3227.98,888.51 ; C17.2@3215.74,886.27 ccw(c3205.5,896.51) C17.2@3219.98,896.51 ; C17.2@3227.98,898.51 3193.08,863.61 3193.08,630 ; v1(3405,242) 3405,212.71 3443.51,174.2 U13.3@3453,174.2 ; v1@3408.54,238.46 cw(c3433.97,213.03) U13.1@3433.97,249 ; v1@3412,249 U13.1@3453,249 ; 3193.08,630 3193.08,464.92 3214,444 v1(3214,408) v1@3214,407 ; v1@3214,407 3212,405 3212,404 3214,406 v1@3214,407
  Top Layer w25: C17.2@3227.98,898.51 3229.98,896.51 C15.2@3292.98,896.51 C16.2@3352.98,896.51 ; C16.2@3361.49,896.51 C16.2@3352.98,896.51 ; 3459.17,943 cw(c3459.17,916.82) U5.2@3477.68,935.33 ; U5.2@3476.36,943 3399.48,943 C16.2@3352.98,896.51 ; U5.2@3482.98,880.32 3482.98,949.62 3482.98,1035.78 3561,1113.8 3848.83,1113.8 3898,1064.63 v1(3898,1038) ; v1(3914,1627) 3955,1668 3955,1677 ; F1.2@3932.63,1437.37 ccw(c3902.75,1467.25) 3945,1467.25 ccw(c3987.25,1467.25) F1.2@3957.37,1437.37 ; F1.2@3935,1440 3935,1425 F1.2@3940,1420 ; F1.2@3945,1407.5 cw(c3945,1343.52) 3990.24,1388.76 ; 3945,1472.27 ccw(c3914.27,1472.27) v1(3936,1494) 3945,1485 F1.2@3945,1425 3954,1425 4011,1368 4011,1235 v1(3977,1201) ; U14.1@3955,1740 3955,1677 ; v1(4033,1791) 4029.8,1787.8 U14.3@4029.8,1740 ; C11.1@4142.4,1787.25 cw(c4100.51,1745) 4160,1745 ; C11.1@4177.6,1787.25 ccw(c4219.49,1745) 4160,1745 ; C11.1@4185.18,1787.32 cw(c4227.86,1744.64) 4227.86,1805 cw(c4227.86,1865.36) C11.1@4185.18,1822.68 ; R5.2@4318,1490 4318,1653.51 C13.2@4275,1696.51 4275,1789 4259,1805 C11.1@4160,1805 4160,1745 ; 3955,1677 4012,1677 4029.8,1694.8 U14.3@4029.8,1740 ; U14.3@4029.8,1740 4155,1740 4160,1745
  Bottom Layer w15: v1(3214,408) 3214,304 3284,234 3397,234 v1(3405,242) ; 3373.62,234 ccw(c3373.62,273.38) v1@3401.46,245.54
  Bottom Layer w25: v1(3898,1038) 3898,1126 3973,1201 v1(3977,1201) ; v1(3914,1627) 3914,1516 v1(3936,1494) ; v1(4033,1791) 4031,1791 4031,1834 4036,1839 4075.32,1839 U4.1@4079.14,1835.18 U4.2@4146.07,1835.18 ; 4057.33,1839 cw(c4057.33,1813.37) U4.1@4075.45,1831.49
VOL_CON: U1.64
VOUT: C1.1 C10.1 C12.2 Q4.S Q6.S R17.2 R32.2 R55.1 R84.1 U4.4 U14.5 | length 5679.8
  Top Layer w10: Q6.S@2757.79,366.19 ccw(c2723.53,400.46) 2771.98,400.46 ; R32.2@2762.56,419.58 cw(c2739.81,396.82) 2771.98,396.82 ; Q6.S@2764.86,359.12 ccw(c2747.67,376.31) 2771.98,376.31 ccw(c2786.3,376.31) Q6.S@2776.18,366.19 ; Q6.S@2771.98,350 2771.98,352 2771.98,419 R32.2@2772.98,420 ; 2771.98,406.48 cw(c2790.51,406.48) R32.2@2777.41,419.58
  Top Layer w20: Q6.S@2761.33,362.66 ccw(c2733.19,390.8) 2772.98,390.8 ; R32.2@2766.1,423.11 cw(c2749.46,406.48) 2772.98,406.48 ; Q6.S@2766.98,349 cw(c2766.98,321.48) 2786.45,340.94 ; Q6.S@2769.98,350 2771.98,352 2772.98,353 R32.2@2772.98,420 ; Q6.S@2770.38,357 2807.58,319.8 2830.36,319.8 2840.78,309.37 2840.78,308.2 2909.78,239.2 2930,239.2 ; Q6.S@2771.98,350 Q6.S@2775.38,350 ; C10.1@2948,1879 2954.3,1885.3 R84.1@3065.3,1885.3 ; 2980.93,239.2 2930,239.2 ; C10.1@2982.95,1869.85 cw(c3018.84,1835.89) 3018.84,1885.3 ; C10.1@2996.95,1894.45 ccw(c3019.02,1916.52) 3019.02,1885.3 ; C10.1@2997.48,1856.1 cw(c3065.3,1791.94) R84.1@3065.3,1885.3 ; 3036.06,1885.3 ccw(c3036.06,1941.94) R84.1@3076.11,1901.89 ; R84.1@3080,1907.5 ccw(c3080,1925.61) R84.1@3092.8,1912.8 ; R84.1@3080,1910.6 R84.1@3080,1900 ; R84.1@3083,1897 R84.1@3080,1900 ; v1(3085,457) 3036.98,408.98 3036.98,328 ; 3187.17,261.83 ccw(c3223,297.67) C1.1@3223,246.99 ; C1.1@3209.51,239.49 3121,328 3036.98,328 ; C1.1@3223,238 C1.1@3223,239.49 ; R17.2@3322.98,495 v1(3323,527.02) Q4.S@3322.98,559 ; v1@3322.98,531.2 cw(c3362.78,531.2) Q4.S@3334.64,559.34 ; Q4.S@3323.33,570.66 ccw(c3309.67,584.31) 3328.98,584.31 ccw(c3348.3,584.31) Q4.S@3334.64,570.66 ; Q4.S@3328.98,565 3328.98,624.97 3403.98,699.97 3713.97,699.97 v1(3771,757) ; R55.1@3430.98,1885 3432.49,1886.51 C12.2@3495.98,1886.51 ; 3495.98,1940.58 C12.2@3495.98,1886.51 ; 3775.67,1052.67 cw(c3826,1002.33) v1@3826,1073.52 ; v1(3777,951) 3777,1054 3806,1083 ; 3792.51,1069.51 cw(c3811.48,1050.54) v1@3824.76,1073.84 ; v1@3824.06,1074.43 ccw(c3806,1059.67) 3806,1083 ; v1@3826,1083 3806,1083 ; v1(3853,1230) 3856,1230 3894,1268 3894,1469 v1(3904,1479) ; 3894,1448.82 cw(c3934.18,1448.82) v1@3905.77,1477.23 ; v1(3922,1820) 3948.3,1846.3 U14.5@3955,1846.3 3955,1872 ; v1@3927.03,1825.03 cw(c3955,1797.06) U14.5@3955,1836.61 ; 3955,1941.6 3955,1872 ; v1(4277,1940) 4257,1960 3951,1960 ; 2930,239.2 3026.2,239.2 3036.98,249.98 3036.98,328 ; R84.1@3065.3,1885.3 R84.1@3080,1900 ; R84.1@3080,1900 3140,1960 3495,1960 ; 3495,1960 3495.98,1959.02 C12.2@3495.98,1886.51 ; 3495,1960 3951,1960 ; 3951,1960 3955,1956 3955,1872
  Bottom Layer w10: U4.4@4279.93,1835.18 4279.93,1868 U4.4@4279.93,1905.07
  Bottom Layer w20: v1(3085,457) 3169.15,457 3170.45,458.3 3252.3,458.3 3323,529 v1(3323,527.02) ; v1(3771,757) v1@3771,945 ; 3771,930.48 cw(c3797.52,930.48) v1@3778.77,949.23 ; v1@3824.98,1076.02 3824.98,1150.98 3853,1179 v1(3853,1230) ; 3896.8,1490.35 cw(c3885.45,1479) v1@3901.5,1479 ; v1(3904,1479) 3904,1483.15 3883.7,1503.45 3883.7,1663.7 3923,1703 v1@3923,1819 ; U4.4@4274.47,1901.66 ccw(c4261.3,1914.83) 4279.93,1914.83 ccw(c4298.56,1914.83) U4.4@4285.39,1901.66 ; v1@4275.23,1938.23 cw(c4263.89,1926.89) 4279.93,1926.89 ; v1(4277,1940) 4279.93,1937.07 U4.4@4279.93,1868
  other v1: 3826,1076.02
VOUT_BF: Q1.S Q8.S R3.2 R10.2 R48.2 R91.1 U13.5 | length 5561.7
  Top Layer w8: R91.1@2832.74,1701.77 cw(c2817.33,1671.84) v1@2851,1671.84 ; R91.1@2836,1712 2851,1697 v1(2851,1674) ; R91.1@2836.4,1708.89 cw(c2824.08,1684.95) v1@2851,1684.95 ; R91.1@2840.06,1716 cw(c2830.83,1698.07) R91.1@2851,1698.07 ; v1@2844.99,1680.01 ccw(c2830.48,1694.52) 2851,1694.52 ccw(c2871.52,1694.52) v1@2857.01,1680.01 ; v1(2868,1493) 2938.76,1493 2979.8,1451.96 2979.8,1351.98 2985.96,1345.82 3141.11,1345.82 3207.38,1279.55 3207.38,1201.37 3252.86,1155.9 3866.86,1155.9 4075.96,946.8 4520.96,946.8 4658.8,808.96 4658.8,299.04 v1@4532,172.24 ; v1@2874.01,1486.99 cw(c2888.52,1472.48) 2888.52,1493 cw(c2888.52,1513.52) v1@2874.01,1499.01 ; Q8.S@3790.58,557 Q8.S@3805.98,557 ; v1@4437,180 v1(4440,177) ; v1@4532.5,165 cw(c4551.19,165) 4537.97,178.22 ; v1@4540.5,165 cw(c4578.5,165) 4551.63,191.87
  Top Layer w20: U13.5@3559.3,249 3570,249 3605,284 3667,284 R10.2@3707,244 ; R10.2@3694.2,256.8 ccw(c3707,269.61) R10.2@3707,251.5 ; R10.2@3707,236.5 cw(c3707,218.39) R10.2@3719.8,231.2 ; Q8.S@3800.33,562.66 ccw(c3786.67,576.31) 3805.98,576.31 ccw(c3825.3,576.31) Q8.S@3811.64,562.66 ; R48.2@3804.98,492 3804.98,556 Q8.S@3805.98,557 3805.98,585.98 v1(3825,605) ; 3804.98,535.27 cw(c3827.71,535.27) Q8.S@3811.64,551.34 ; v1(3898,480) 3899,479 3899,384 3835,320 3725,320 3707,302 R10.2@3707,244 ; 4397,269.41 cw(c4443.57,269.41) Q1.S@4410.64,302.34 ; R3.2@4401.11,244.92 cw(c4412.51,217.51) 4433.5,238.5 ; Q1.S@4404.98,308 4397,300.02 R3.2@4397,250 4422,250 4440,232 v1(4440,177) 4440,168 4382,110 4125,110 4100.2,134.8 3772.2,134.8 3753,154 3753,198 R10.2@3707,244 ; 4429.37,157.37 ccw(c4409.74,177) v1@4437.5,177
  Bottom Layer w8: v1@2844.99,1667.99 cw(c2830.48,1653.48) 2851,1653.48 cw(c2871.52,1653.48) v1@2857.01,1667.99 ; 2849.18,1634.38 2849.18,1511.82 v1(2868,1493) ; 2851,1636.2 v1(2851,1674) ; v1@2859.5,1493 ccw(c2838.98,1493) 2853.49,1507.51 ccw(c2868,1522.02) v1@2868,1501.5 ; v1(4440,177) 4462,177 4474,165 v1(4532,165) ; v1@4446.01,170.99 cw(c4460.52,156.48) 4460.52,177 cw(c4460.52,197.52) v1@4446.01,183.01 ; v1@4525.99,158.99 ccw(c4511.48,144.48) 4511.48,165 ccw(c4511.48,185.52) v1@4525.99,171.01
  Bottom Layer w20: v1(3825,605) 3849,581 3849,529 v1(3898,480)
VTEST_OUT1: P1.1 R34.2 R38.1 R94.1 TP2.1 | length 3774.7
  Top Layer w20: P1.1@269.19,716.45 cw(c216.54,663.8) 291,663.8 ; P1.1@283,730.26 291,722.26 291,196 357,130 1786,130 1914,258 2022,258 R94.1@2073,309 ; TP2.1@1903.43,438.54 cw(c1903.43,390.25) 1937.58,424.39 cw(c1971.72,458.54) TP2.1@1923.43,458.54 ; TP2.1@1903.43,458.54 1957.97,404 1978,404 R94.1@2073,309 ; R94.1@2073,289 ccw(c2073,240.72) 2038.86,274.86 ccw(c2004.72,309) 2053,309 ccw(c2004.72,309) 2038.86,343.14 ccw(c2073,377.28) 2073,329 ccw(c2073,377.28) 2107.14,343.14 ccw(c2141.28,309) R94.1@2093,309 ; 2151.18,387.18 ccw(c2074.36,464) R38.1@2183,464 ; 2185.32,421.32 ccw(c2142.64,464) R38.1@2203,464 ; R38.1@2187.36,451.53 ccw(c2227.92,483.87) 2227.92,432 ; R38.1@2203.94,444.02 cw(c2205.87,402.87) 2235,432 ; R38.1@2218.64,476.47 ccw(c2310.98,550.11) R34.2@2310.98,432 2235,432 ; R38.1@2222.98,463.06 ccw(c2264.13,461.13) 2235,432 ; 2269.45,432 cw(c2269.45,516.99) R38.1@2203,464 ; R94.1@2073,309 2203,439 R38.1@2203,464 ; R38.1@2203,464 2235,432
VTEST_OUT2_IN: P1.3 Q1.D R49.2 R50.1 TP3.1 | length 6422.4
  Top Layer w20: P1.3@283,810.73 cw(c283,763.59) 316.34,796.92 cw(c349.67,830.26) P1.3@302.53,830.26 ; P1.3@283,830.26 340.8,772.46 340.8,673 318.8,651 318.8,207.52 361.32,165 v1(389,165) ; v1(390,94) 398.2,102.2 1797.52,102.2 1890.32,195 3118,195 3206,107 4088.68,107 4113.48,82.2 4421.2,82.2 4489,150 4489,403 R50.1@4373,519 ; v1@391.77,92.23 cw(c415.83,68.17) 415.83,102.2 ; R49.2@4259.98,542 4297,542 4320,519 R50.1@4373,519 ; R50.1@4358.86,533.14 cw(c4324.72,567.28) 4324.72,519 cw(c4324.72,470.72) 4358.86,504.86 cw(c4339.24,485.24) 4366.98,485.24 ; Q1.D@4361.33,400.66 ccw(c4347.67,414.31) 4366.98,414.31 ccw(c4386.3,414.31) Q1.D@4372.64,400.66 ; Q1.D@4366.98,388 4366.98,512.98 R50.1@4373,519 ; 4366.98,456.19 cw(c4435.81,456.19) R50.1@4387.14,504.86 ; R50.1@4373,499 cw(c4373,450.72) 4407.14,484.86 cw(c4441.28,519) 4393,519 cw(c4484.74,519) 4419.87,583.87 ; 4385.73,549.73 ccw(c4416.46,519) R50.1@4373,519 ; TP3.1@4487.62,603.97 ccw(c4454.02,570.8) 4454.02,618.02 ; TP3.1@4487.62,632.06 cw(c4454.02,665.23) 4454.02,618.02 ; TP3.1@4501.86,618.02 4454.02,618.02 ; R50.1@4373,519 4373,537 4454.02,618.02
  Bottom Layer w20: v1(390,94) v1@390,164
XT1: C6.2 U1.12 Y1.1 | length 468
  Top Layer w8: C6.2@1895.49,1267 Y1.1@1993.98,1267 2041.98,1267 ; C6.2@1905.63,1258.87 cw(c1925.26,1239.24) 1925.26,1267 cw(c1925.26,1294.76) C6.2@1905.63,1275.13 ; Y1.1@1967.15,1255.91 ccw(c1940.37,1229.13) 1940.37,1267 ccw(c1940.37,1304.87) Y1.1@1967.15,1278.09 ; Y1.1@2022.07,1257.32 cw(c2041.98,1241.69) 2041.98,1267 ; Y1.1@2022.07,1276.68 ccw(c2041.98,1292.31) 2041.98,1267 ; U1.12@2179.14,1352.47 2127.46,1352.47 2041.98,1267
XT2: R43.2 U1.11 | length 452.5
  Top Layer w8: R43.2@1894.8,1405.18 cw(c1923.33,1376.65) 1923.33,1417 ; R43.2@1898.77,1404.78 R43.2@1895.98,1402 1910.98,1417 2043.98,1417 2088.83,1372.16 U1.11@2179.14,1372.16 ; R43.2@1900.46,1399.53 cw(c1942.65,1357.34) 1942.65,1417 ; R43.2@1906.12,1393.87 cw(c1961.96,1338.02) 1961.96,1417
pads on no net: J7.1 U1.5 U1.14 U1.15 U1.16 U1.23 U1.24 U1.25 U1.26 U1.49 U1.50 U1.51 U1.52 U1.53 U1.54 U1.55 U1.56 U6.1 U7.1 U8.1 U9.1 U10.1 U11.3 U12.3 U12.4 U16.1 U16.5 U16.8 U17.1 U17.5 U17.8

## Polygon pours and split planes (outlines as drawn)
GND on Top Layer "Top Layer-No Net" (solid, remove dead copper, pour order 1001): -59,-56 4996,-56 4996,2613.1 5000,2617.94 4996,2613.1 4228,2613.1 -46,2613.1 -55,2624 -55,-36.62 -63,-46.31
GND on Bottom Layer "Top Layer-No Net" (solid, remove dead copper, pour order 1000): -93,2635 -93,-137 2744,-137 4937,-137 4937,2598.75 4920,2619.29 4907,2635 -93,2635

## Keep-outs
Keep-Out Layer:
  circle w10: c4749.89,119.11 r62.99
  circle w10: c118.11,118.11 r62.99
  circle w10: c109.01,2458 r62.99
  circle w10: c4757.01,2455 r62.99
  lines w5: 0,2054 0,2362 1,2363 1,2556 -2,2559 4868,2559 4868,2067
  lines w8: 0,2092.39 0,0 413,0 ; 373.98,0 2091,0 ; 2021,0 4779,0 ; 4725,0 4867,0 4868,1 4868,2093

## Other copper
Top Layer:
  rectangle net GND: 2313,24 2718,142
  rectangle net GND: 2368,2428 2667,2537
Bottom Layer:
  rectangle net GND: 2345,21 2693,139
  rectangle net GND: 2339,2406 2695,2537

## Silkscreen, mask and mechanical layers (free items; w line width, h text height)
Top Overlay:
  lines w4: 259.42,392.49 299.42,392.49 ; 259.42,396.49 295.42,396.49 ; 259.42,400.49 291.42,400.49 ; 259.42,404.49 295.42,404.49 ; 263.42,384.49 307.42,384.49 ; 263.42,388.49 303.42,388.49 ; 263.42,408.49 299.42,408.49 ; 263.42,412.49 303.42,412.49 ; 267.42,380.49 311.42,380.49 ; 267.42,416.49 307.42,416.49 ; 267.42,420.49 311.42,420.49 ; 271.42,376.49 315.42,376.49 ; 271.42,424.49 315.42,424.49 ; 275.42,372.49 319.42,372.49 ; 275.42,428.49 319.42,428.49 ; 279.42,368.49 323.42,368.49 ; 279.42,432.49 323.42,432.49 ; 283.42,364.49 327.42,364.49 ; 283.42,436.49 327.42,436.49 ; 287.42,360.49 331.42,360.49 ; 287.42,440.49 331.42,440.49 ; 291.42,356.49 335.42,356.49 ; 291.42,444.49 335.42,444.49 ; 295.42,352.49 339.42,352.49 ; 295.42,448.49 339.42,448.49 ; 299.42,348.49 343.42,348.49 ; 299.42,452.49 343.42,452.49 ; 303.42,344.49 347.42,344.49 ; 303.42,456.49 347.42,456.49 ; 307.42,340.49 351.42,340.49 ; 307.42,460.49 351.42,460.49 ; 311.42,336.49 355.42,336.49 ; 311.42,464.49 355.42,464.49 ; 315.42,332.49 359.42,332.49 ; 315.42,468.49 359.42,468.49 ; 319.42,328.49 363.42,328.49 ; 319.42,472.49 363.42,472.49 ; 323.42,324.49 367.42,324.49 ; 323.42,476.49 367.42,476.49 ; 327.42,320.49 371.42,320.49 ; 327.42,480.49 371.42,480.49 ; 331.42,316.49 375.42,316.49 ; 331.42,484.49 375.42,484.49 ; 335.42,312.49 423.42,312.49 ; 335.42,400.49 379.42,400.49 ; 335.42,488.49 419.42,488.49 ; 339.42,308.49 419.42,308.49 ; 339.42,396.49 379.42,396.49 ; 339.42,404.49 383.42,404.49 ; 339.42,492.49 415.42,492.49 ; 343.42,304.49 415.42,304.49 ; 343.42,392.49 383.42,392.49 ; 343.42,408.49 387.42,408.49 ; 343.42,496.49 411.42,496.49 ; 347.42,300.49 411.42,300.49 ; 347.42,388.49 387.42,388.49 ; 347.42,412.49 391.42,412.49 ; 347.42,500.49 407.42,500.49 ; 351.42,296.49 407.42,296.49 ; 351.42,384.49 391.42,384.49 ; 351.42,416.49 395.42,416.49 ; 351.42,504.49 403.42,504.49 ; 355.42,292.49 403.42,292.49 ; 355.42,380.49 395.42,380.49 ; 355.42,420.49 399.42,420.49 ; 355.42,508.49 399.42,508.49 ; 359.42,288.49 399.42,288.49 ; 359.42,376.49 399.42,376.49 ; 359.42,424.49 403.42,424.49 ; 361.42,427.49 405.42,427.49 ; 363.42,284.49 391.42,284.49 ; 363.42,372.49 395.42,372.49 ; 363.42,429.49 407.42,429.49 ; 363.42,512.49 395.42,512.49 ; 367.42,368.49 391.42,368.49 ; 367.42,432.49 411.42,432.49 ; 371.42,364.49 387.42,364.49 ; 371.42,436.49 415.42,436.49 ; 371.42,516.49 383.42,516.49 ; 375.42,360.49 383.42,360.49 ; 375.42,440.49 419.42,440.49 ; 379.42,444.49 423.42,444.49 ; 379.42,484.49 423.42,484.49 ; 383.42,316.49 427.42,316.49 ; 383.42,480.49 427.42,480.49 ; 384.42,448.49 428.42,448.49 ; 387.42,320.49 431.42,320.49 ; 387.42,452.49 431.42,452.49 ; 387.42,476.49 431.42,476.49 ; 391.42,324.49 435.42,324.49 ; 391.42,456.49 435.42,456.49 ; 391.42,472.49 435.42,472.49 ; 395.42,328.49 439.42,328.49 ; 395.42,460.49 439.42,460.49 ; 395.42,468.49 439.42,468.49 ; 399.42,332.49 443.42,332.49 ; 399.42,464.49 443.42,464.49 ; 403.42,336.49 447.42,336.49 ; 407.42,340.49 451.42,340.49 ; 411.42,344.49 455.42,344.49 ; 415.42,348.49 459.42,348.49 ; 419.42,352.49 463.42,352.49 ; 419.42,396.49 503.42,396.49 ; 423.42,356.49 459.42,356.49 ; 423.42,392.49 459.42,392.49 ; 423.42,400.49 459.42,400.49 ; 427.42,360.49 455.42,360.49 ; 427.42,388.49 455.42,388.49 ; 427.42,404.49 455.42,404.49 ; 431.42,364.49 451.42,364.49 ; 431.42,384.49 451.42,384.49 ; 431.42,408.49 451.42,408.49 ; 435.42,368.49 447.42,368.49 ; 435.42,380.49 447.42,380.49 ; 435.42,412.49 447.42,412.49 ; 439.42,372.49 443.42,372.49 ; 439.42,376.49 443.42,376.49 ; 439.42,416.49 443.42,416.49 ; 463.42,440.49 503.42,440.49 ; 467.42,392.49 503.42,392.49 ; 467.42,400.49 503.42,400.49 ; 467.42,436.49 503.42,436.49 ; 467.42,444.49 503.42,444.49 ; 471.42,388.49 499.42,388.49 ; 471.42,404.49 499.42,404.49 ; 471.42,432.49 499.42,432.49 ; 471.42,448.49 495.42,448.49 ; 475.42,384.49 495.42,384.49 ; 475.42,408.49 495.42,408.49 ; 475.42,428.49 495.42,428.49 ; 475.42,452.49 491.42,452.49 ; 479.42,380.49 491.42,380.49 ; 479.42,412.49 491.42,412.49 ; 479.42,424.49 491.42,424.49 ; 479.42,456.49 487.42,456.49 ; 483.42,376.49 487.42,376.49 ; 483.42,416.49 487.42,416.49 ; 483.42,420.49 487.42,420.49
  lines w5: 127,1109 72,1109 70,1107 70,1330 133,1330
  text "G" at 4637,1134 h60
  text "R" at 4641,1038 h60
  text "3" at 2938,984 h32
  text "2" at 2836,983 h32
  text "1" at 2740,980 h32
  text "T" at 4645,935 h60
  text "V" at 4645,834 h60
  text "VIN" at 1867,502.83 h32
  text "designed by cc" at 1389,229 h32
  text "VIEWSHINE" at 221.42,202.49 h70.01
  text "WX0.001.613PCB" at 1394,180 h32
  text "2017.08.23" at 1405,130 h32
  text "V1.0.1" at 1414,76.9 h32
Top Solder:
  rectangle: 2381,29 2655,99
  rectangle: 2388,2465 2662,2535

## Text inside footprints (layer, text, board x,y; h text height)
P1: Top Overlay "2" at 203,630.26 h32 r90; Top Overlay "1" at 303,630.26 h32 r90; Top Overlay "19" at 303,1690.26 h32 r90; Top Overlay "20" at 203,1690.26 h32 r90